# EAGLE board ProMiniShieldLEDRotate (EAGLE 7.1.0)
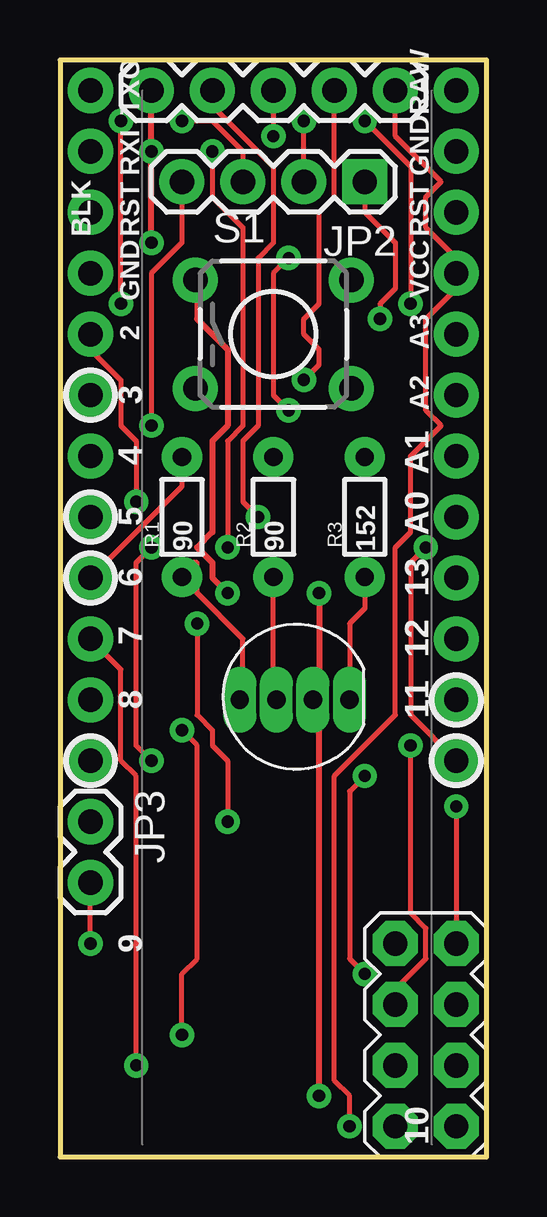
[diagram p0: board, top side]
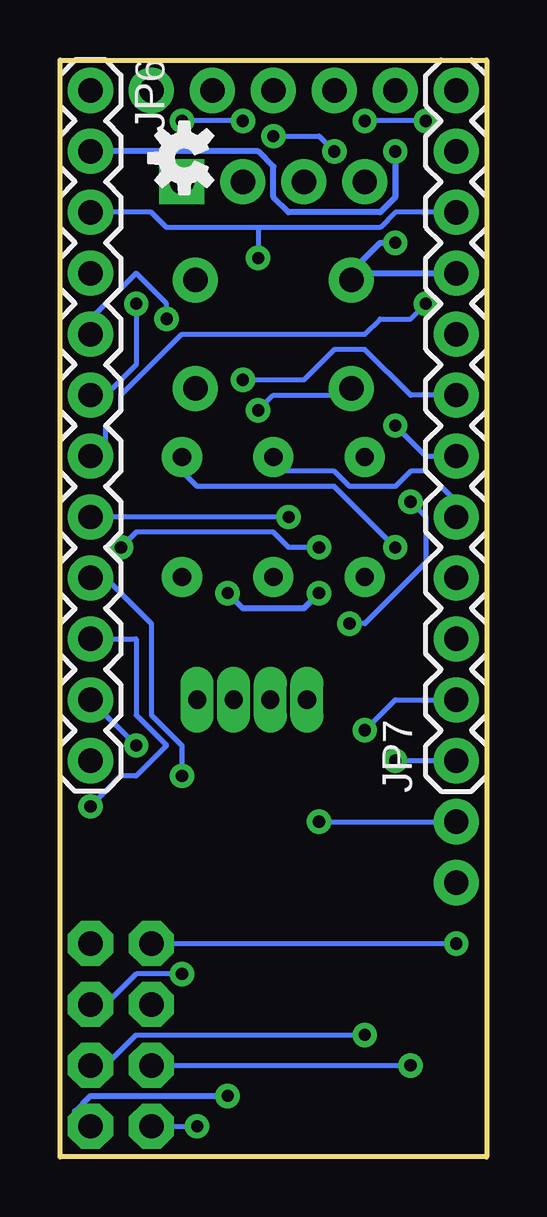
[diagram p1: board, bottom side, seen from below]

Size 17.78 x 45.72 mm. Coordinates in mm from the lower left corner, seen from the top.
Outline: 0,45.72 0,0 17.78,0 17.78,45.72 0,45.72
Copper layers (1*16): Top 0.035mm / dielectric 1.5mm / Bottom 0.035mm
Design rules "default": minimum track width 8mil, minimum drill 20mil, track to track 8mil, track to pad 8mil, pad to pad 8mil, via to via 8mil, smd to smd 8mil, copper to edge 8mil, drill to drill 8mil, minimum pad ring 12mil, minimum via ring 10mil, stop-mask expansion 4mil, vias tented up to drill 20mil, thermal gap 10mil
Net classes: 0 default: width 0.203 mm; 1 vcc: width 0.254 mm

## Footprints (pad centres in the part's own frame; a part is rotated, then mirrored left to right if it is on the bottom)
LED-RGB-THRU = drill 0.762 pad 0.889 long: 1 1.905,0; 2 0.381,0; 3 -1.143,0; 4 -2.667,0
1X05 = drill 1.016 pad 1.88: 1 0,0; 2 2.54,0; 3 5.08,0; 4 7.62,0; 5 10.16,0
1X04 = drill 1.016 pad 1.88 square: 1 0,0 | drill 1.016 pad 1.88: 2 2.54,0; 3 5.08,0; 4 7.62,0
1X02 = drill 1.016 pad 1.88: 1 0,0; 2 2.54,0
1X12 = drill 1.016 pad 1.88: 1 0,0; 2 2.54,0; 3 5.08,0; 4 7.62,0; 5 10.16,0; 6 12.7,0; 7 15.24,0; 8 17.78,0; 9 20.32,0; 10 22.86,0; 11 25.4,0; 12 27.94,0
1/6W-RES = drill 0.762 pad 1.676: 1 -2.5,0; 2 2.5,0
TACTILE-PTH = drill 1.016 pad 1.88: 1 -3.251,2.261; 2 3.251,2.261; 3 -3.251,-2.261; 4 3.251,-2.261
2X4 = drill 1.016 pad 1.88 octagon: 1 -3.81,-1.27; 2 -3.81,1.27; 3 -1.27,-1.27; 4 -1.27,1.27; 5 1.27,-1.27; 6 1.27,1.27; 7 3.81,-1.27; 8 3.81,1.27

## Placement (x,y rotation side)
D2  LED-RGB-CC-THRUCLEAR  [LED-RGB-THRU]  10.16,19.05 0 top
JP1  Edge  [1X05]  3.81,44.45 0 top
JP2  Extra  [1X04]  12.7,40.64 180 top
JP3  M02PTH  [1X02]  1.27,13.97 270 top
JP6  [1X12]  16.51,44.45 270 bottom
JP7  [1X12]  1.27,16.51 90 bottom
R1  90  [1/6W-RES]  5.08,26.67 90 top
R2  90  [1/6W-RES]  8.89,26.67 90 top
R3  152  [1/6W-RES]  12.7,26.67 90 top
S1  SWITCH-MOMENTARY-2PTH  [TACTILE-PTH]  8.89,34.29 0 top
U$1  M04X2  [2X4]  15.24,5.08 90 top
U$3  OSHW-LOGOS  [OSHW-LOGO-S]  12.6,41.63 90 bottom

## Library data of the parts
D2 = SparkFun-LED-MenloFix; PROD_ID: DIO-08418
JP1-JP3 U$1 = SparkFun-Connectors
JP6 JP7 U$3 = SparkFun
R1-R3 = SparkFun-Resistors
S1 = SparkFun-Electromechanical

## Nets
A0: JP1.2 JP6.8
A1: JP2.3 JP6.7
A2: JP2.2 JP6.6
A3: JP2.1 JP6.5
CE_RADIO: JP7.2 U$1.3
CSN_RADIO: JP7.3 U$1.4
D2: JP3.1 JP7.8
D3: JP1.4 JP7.7
D4: JP2.4 JP7.6
D10: JP1.3 JP6.12
DIO5_GREEN: JP7.5 R2.2
DIO6_BLUE: JP7.4 R1.2
DIO9_RED: JP7.1 R3.2
GND [vcc]: D2.2 JP1.1 JP6.2 JP7.9 S1.1 U$1.1
INT_RADIO: JP3.2 U$1.8
MISO: JP6.10 U$1.7
MOSI: JP6.11 U$1.6
N$1: D2.4 R1.1
N$2: D2.3 R2.1
N$3: D2.1 R3.1
RAW [vcc]: JP6.1
RESET: JP6.3 JP7.10 S1.3
RXI: JP7.11
SCK: JP6.9 U$1.5
TXO: JP7.12
VCC: JP1.5 JP6.4 U$1.2

## Tracks (layer width: path | path; a pad name or v marks a point on that pad's centre or on a via)
A0  (via drill 0.51)
  Top 0.203: v8.26,26.67 7.62,27.3 7.62,29.84 8.26,30.48 8.26,37.47 8.89,38.1 8.89,41.27 6.35,43.81 JP1.2
  Bottom 0.203: v8.26,26.67 JP6.8
A1  (via drill 0.51)
  Top 0.203: JP2.3 7.62,41.91 6.35,43.18 v5.08,43.18 | v2.54,35.56 v2.54,43.18
  Bottom 0.203: v2.54,43.18 v5.08,43.18 | v2.54,35.56 3.17,34.92 4.45,34.92 5.08,34.29 12.7,34.29 15.24,31.75 15.24,31.11 15.88,30.48 15.88,29.21 JP6.7
A2  (via drill 0.51)
  Top 0.203: v14.61,35.56 14.61,41.27 v12.7,43.18 | JP2.2 v10.16,43.18
  Bottom 0.203: JP6.6 15.88,31.75 14.61,33.02 v14.61,35.56 | v10.16,43.18 v12.7,43.18
A3  (via drill 0.51)
  Top 0.203: v13.34,34.92 13.34,35.56 13.97,36.2 13.97,38.1 12.7,39.37 JP2.1
  Bottom 0.203: JP6.5 16.51,34.92 14.61,36.83 13.34,35.56 v13.34,34.92
CE_RADIO  (via drill 0.51)
  Top 0.203: v5.08,17.78 5.71,17.14 5.71,8.26 5.08,7.62 v5.08,5.08
  Bottom 0.203: JP7.2 3.81,19.05 v5.08,17.78 | v5.08,5.08 14.61,5.08 15.88,3.81 U$1.3
CSN_RADIO  (via drill 0.51)
  Top 0.203: JP7.3 2.54,20.32 2.54,16.51 3.17,15.88 v3.17,3.81
  Bottom 0.203: U$1.4 v3.17,3.81
D2  (via drill 0.51)
  Top 0.203: v6.99,13.97 6.99,16.51 6.35,17.14 6.35,17.78 5.71,18.41 v5.71,22.23 | v3.17,27.3 3.17,29.84 2.54,30.48 2.54,32.38 1.27,33.66 JP7.8
  Bottom 0.203: v6.99,13.97 JP3.1 | v5.71,22.23 5.08,22.23 2.54,24.77 2.54,26.67 v3.17,27.3
D3  (via drill 0.51)
  Top 0.203: JP1.4 11.43,40.01 10.79,39.37 10.79,35.56 10.16,34.92 10.16,34.29 10.79,33.66 10.79,33.02 v10.16,32.38
  Bottom 0.203: v10.16,32.38 7.62,32.38 6.35,33.66 5.08,33.66 3.17,31.75 JP7.7
D4  (via drill 0.51)
  Top 0.203: v3.81,30.48 3.81,36.83 5.08,38.1 JP2.4
  Bottom 0.203: JP7.6 2.54,29.21 v3.81,30.48
D10  (via drill 0.51)
  Top 0.203: JP6.12 14.61,18.41 14.61,24.77 v15.24,25.4 | v6.99,25.4 6.99,29.84 7.62,30.48 7.62,38.73 6.35,40.01 v6.35,41.91 | JP1.3 v8.89,42.55
  Bottom 0.203: v15.24,25.4 14.61,26.04 8.89,26.04 8.26,25.4 v6.99,25.4 | v6.35,41.91 6.99,42.55 v8.89,42.55
DIO5_GREEN
  Bottom 0.203: JP7.5 1.27,27.3 2.54,28.57 3.17,28.57 3.81,27.94 5.71,27.94 6.35,28.57 8.89,28.57 R2.2
DIO6_BLUE
  Top 0.203: JP7.4 5.08,27.94 R1.2
DIO9_RED  (via drill 0.51)
  Top 0.203: v3.81,25.4 3.17,24.77 3.17,17.14 v3.81,16.51
  Bottom 0.203: v3.81,25.4 6.35,27.94 12.06,27.94 12.7,28.57 R3.2 | JP7.1 v3.81,16.51
GND  (via drill 0.51)
  Top 0.254: v10.79,2.54 10.79,19.05 | v10.79,23.5 10.79,19.05 | v6.99,23.5 6.35,24.13 6.35,24.77 5.71,25.4 6.35,26.04 6.35,29.84 6.99,30.48 6.99,33.66 5.71,34.92 5.71,36.2 S1.1 | 10.79,19.05 D2.2 | v3.81,38.1 v3.81,41.91 JP1.1
  Bottom 0.254: v10.79,2.54 16.51,2.54 17.14,1.91 17.14,1.27 U$1.1 | v10.79,23.5 10.16,22.86 7.62,22.86 v6.99,23.5 | JP7.9 5.08,36.83 S1.1 5.71,36.83 4.45,38.1 v3.81,38.1 | JP6.2 9.53,41.91 8.89,41.27 8.89,40.01 8.26,39.37 4.45,39.37 3.81,40.01 v3.81,41.91
INT_RADIO  (via drill 0.51)
  Top 0.203: v1.27,8.89 JP3.2
  Bottom 0.203: U$1.8 v1.27,8.89
MISO  (via drill 0.51)
  Top 0.203: v16.51,14.61 U$1.7
  Bottom 0.203: v16.51,14.61 15.24,15.88 14.61,15.88 13.34,17.14 14.61,18.41 14.61,21.59 JP6.10
MOSI  (via drill 0.51)
  Top 0.203: v14.61,17.14 14.61,10.16 15.24,9.53 15.24,8.26 13.97,6.99 U$1.6
  Bottom 0.203: v14.61,17.14 JP6.11
N$1
  Top 0.203: R1.1 5.08,24.77 5.71,24.77 5.71,23.5 7.62,21.59 7.62,19.05 D2.4
N$2
  Top 0.203: R2.1 8.89,19.05 D2.3
N$3
  Top 0.203: D2.1 12.06,22.23 12.7,22.86 R3.1
RESET  (via drill 0.51)
  Top 0.203: v9.53,31.11 8.89,31.75 8.89,36.83 v9.53,37.47
  Bottom 0.203: JP6.3 13.97,39.37 13.34,38.73 9.53,38.73 | 9.53,38.73 4.45,38.73 3.81,39.37 JP7.10 | v9.53,31.11 8.89,31.75 5.71,31.75 S1.3 | 9.53,38.73 v9.53,37.47
SCK  (via drill 0.51)
  Top 0.203: v12.7,7.62 12.06,8.26 12.06,15.24 v12.7,15.88
  Bottom 0.203: U$1.5 15.88,6.35 14.61,7.62 v12.7,7.62 | v12.7,15.88 12.7,17.14 13.97,18.41 13.97,22.23 15.88,24.13 JP6.9
VCC  (via drill 0.51)
  Top 0.203: v12.06,1.27 12.06,2.54 11.43,3.17 11.43,15.88 13.97,18.41 13.97,25.4 14.61,26.04 14.61,29.21 15.88,30.48 15.24,31.11 15.24,34.92 16.51,36.2 JP6.4 16.51,37.47 15.24,38.73 15.24,40.01 15.88,40.64 13.97,42.55 JP1.5
  Bottom 0.203: U$1.2 v12.06,1.27

## Text on the board
tPlace: TXO | RAW | RXI | GND | BLK | RST | RST | GND | VCC | 2 | A3 | 3 | A2 | 4 | A1 | 5 | A0 | 6 | 13 | 7 | 12 | 8 | 11 | 9 | 10